# Altium PCB 21A.PcbDoc
Units mil, origin at the board's own origin, x right, y up, seen from the top; angles counter-clockwise.
Board outline 6000 x 4000 mil, 2 copper layers (Top Layer, Bottom Layer); 43 components, 21 nets, 118 pads, 2 vias.
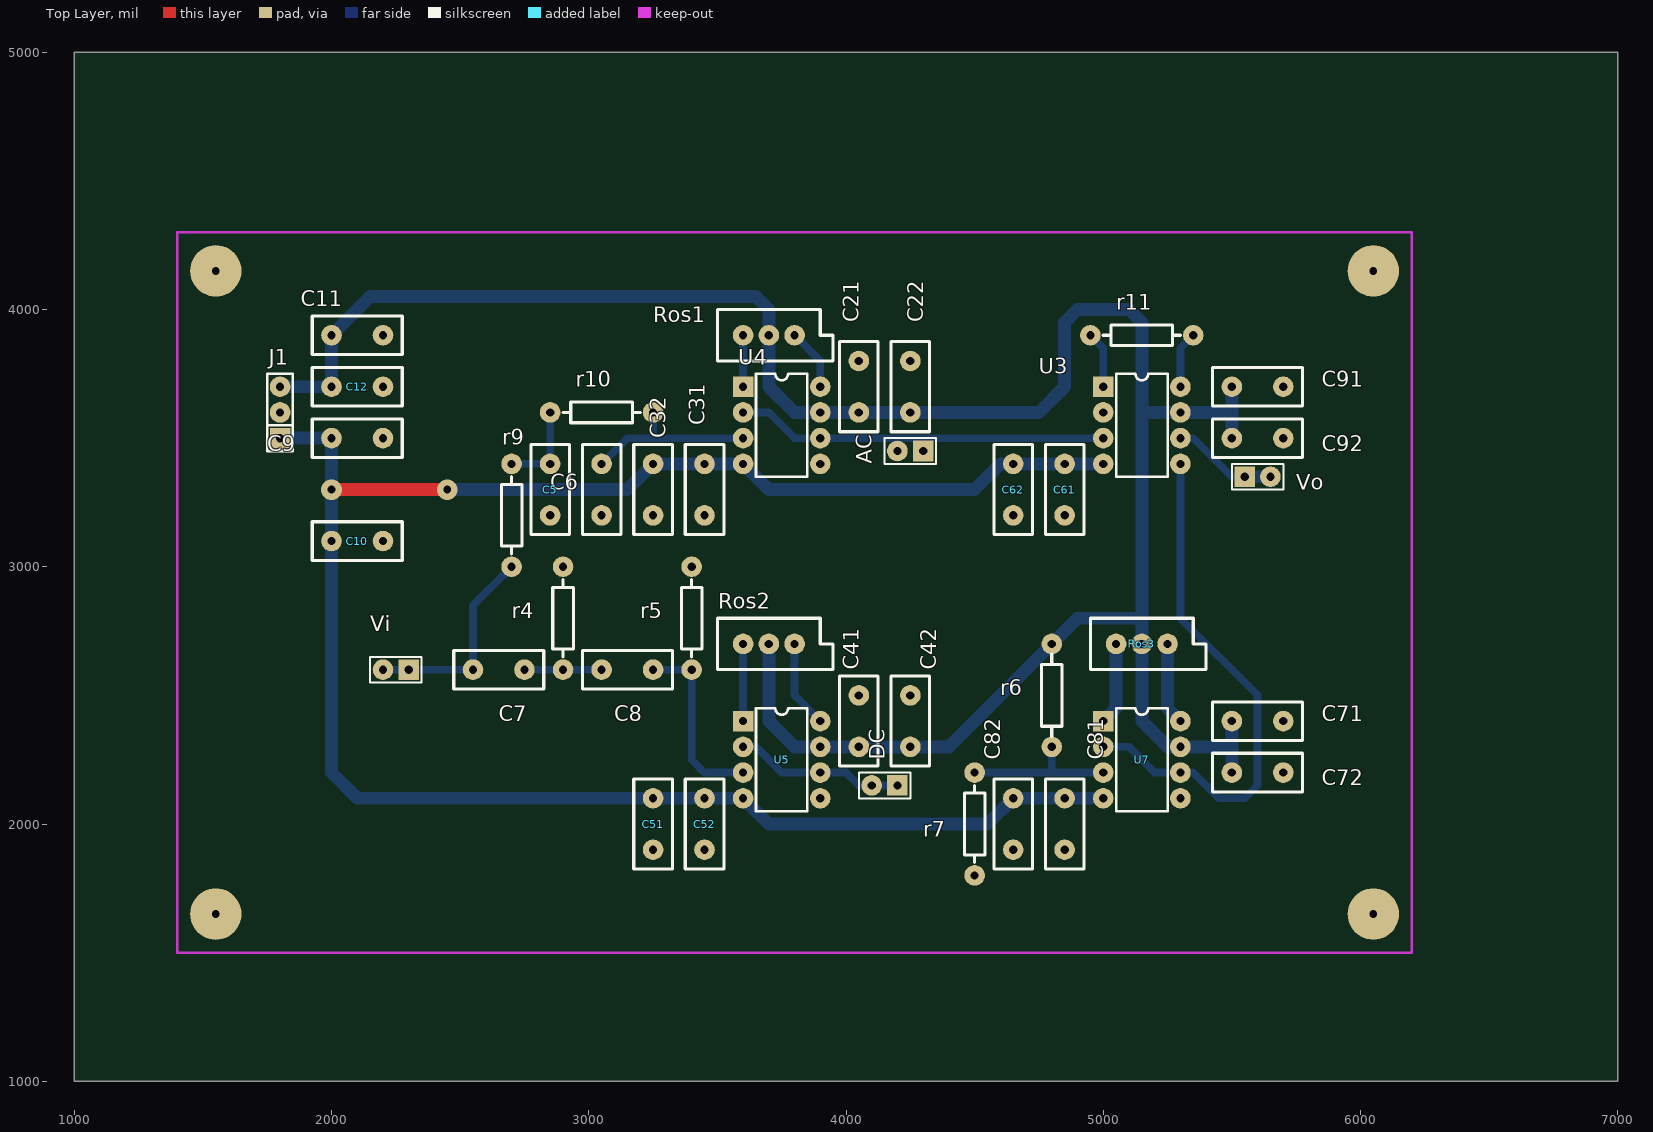
[diagram p0: Top Layer view]
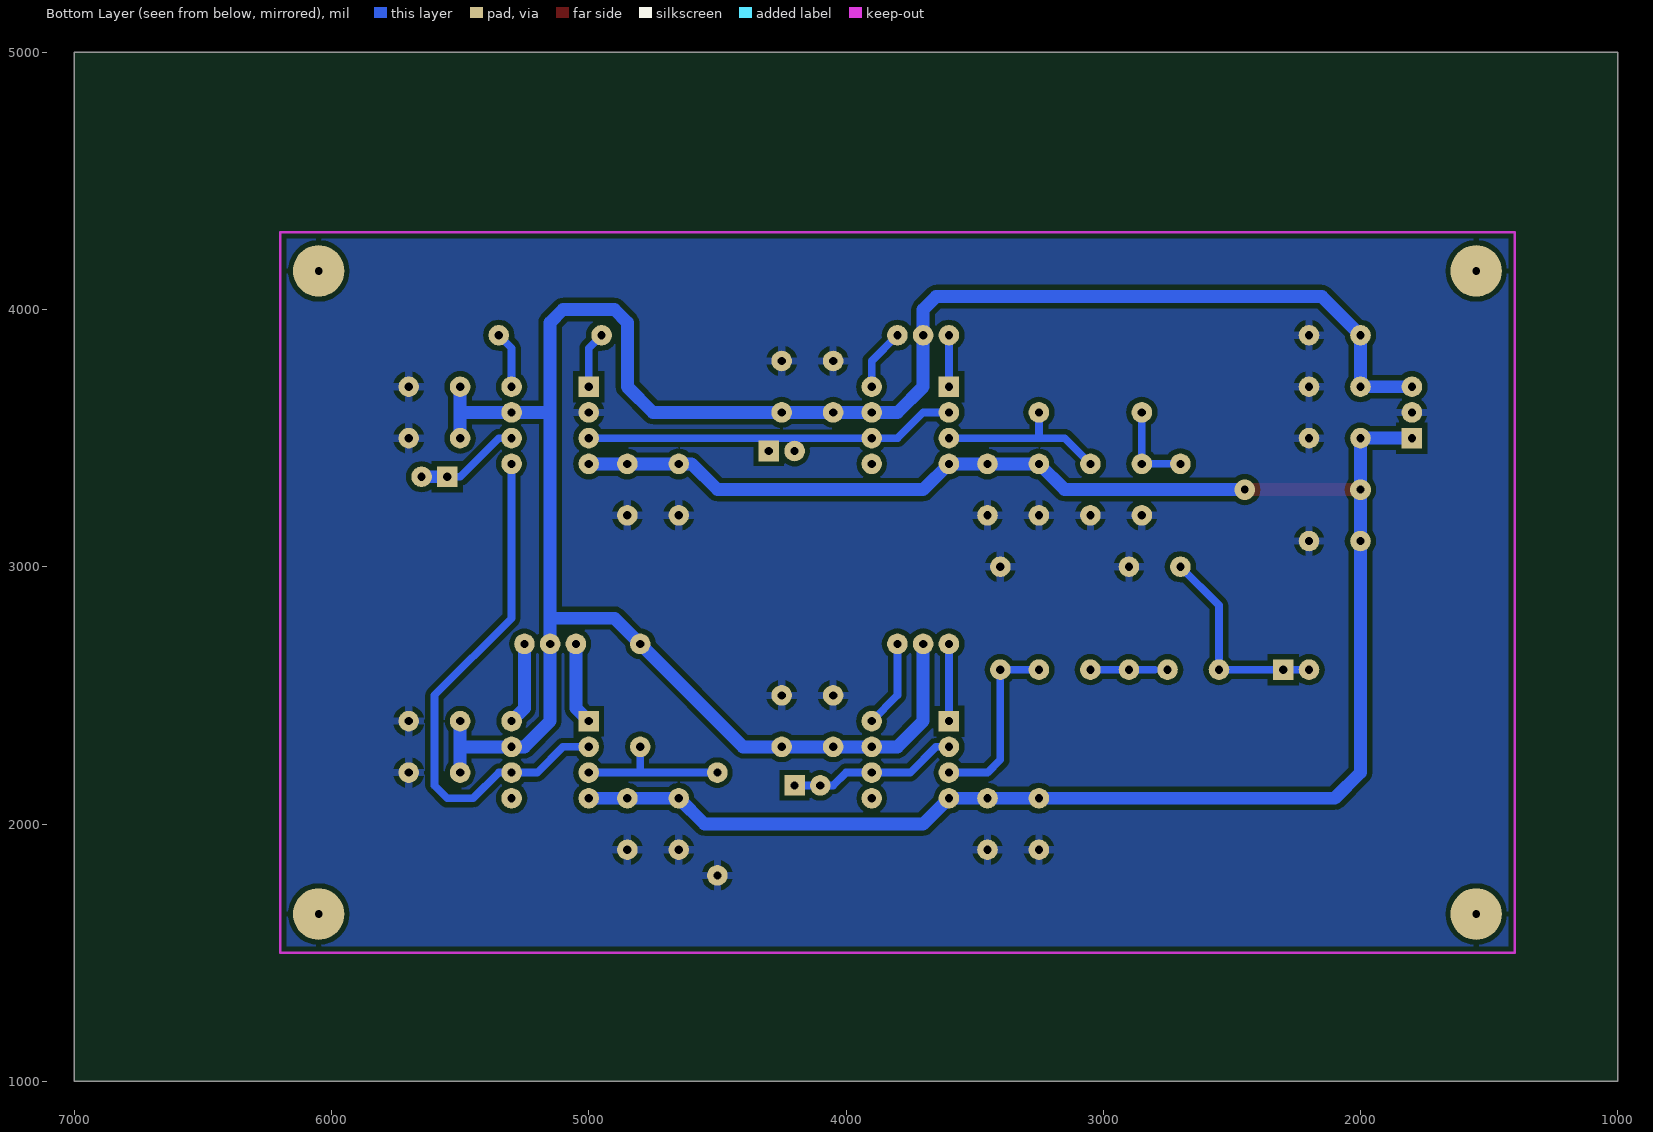
[diagram p1: Bottom Layer view, seen from below]

## Layer stack, top to bottom
Top Layer: signal copper 1.4
Dielectric: dielectric 12.6, FR-4, Dk 4.8
Bottom Layer: signal copper 1.4

## Board outline
1000,1000 7000,1000 7000,5000 1000,5000

## Design rules (kind name [scope] priority, off if disabled: settings)
Clearance [All] p1: gap=20
PolygonConnect Viagndconnect [(InNet('GND') AND InPadClass('All Pads'))] p1: connectstyle=Relief reliefconductorwidth=30 reliefentries=4 polygonreliefangle="90 Angle"
PolygonConnect [All] p2: connectstyle=Relief reliefconductorwidth=30 reliefentries=4 polygonreliefangle="90 Angle"
RoutingVias [All] p1: holewidth=28 width=50 viastyle="Through Hole" minholewidth=28 minwidth=50 maxholewidth=28 maxwidth=50
SilkscreenOverComponentPads [IsPad] p1: minsilkscreentomaskgap=10
SolderMaskExpansion [All] p1: expansion=4
TestPointUsage [All] p1: valid=0 allowmultiple=FALSE
Testpoint [All] p1: side=3 testpointundercomponent=TRUE minsize=40 maxsize=100 preferedsize=60 minholesize=0 maxholesize=40 preferedholesize=32 testpointgrid=1 style=297 order=0123456789
Width [All] p1: maxlimit=100 minlimit=30 preferedwidth=30
23 further rules are at their usual default settings.

## Components (designator, comment, footprint, x,y, rotation, side; value= is the part's Value field where it differs from the comment)
AC "Header 2" HDR1X2 4300,3450 r180 top
C5 "Cap2" RAD0.2 2850,3400 r270 top
C6 "Cap2" RAD0.2 3050,3400 r270 top
C7 "Cap2" RAD0.2 2750,2600 r180 top
C8 "Cap2" RAD0.2 3250,2600 r180 top
C9 "Cap2" RAD0.2 2000,3500 r0 top
C10 "Cap2" RAD0.2 2000,3100 r0 top
C11 "Cap2" RAD0.2 2000,3900 r0 top
C12 "Cap2" RAD0.2 2000,3700 r0 top
C21 "Cap2" RAD0.2 4050,3600 r90 top
C22 "Cap2" RAD0.2 4250,3600 r90 top
C31 "Cap2" RAD0.2 3450,3400 r270 top
C32 "Cap2" RAD0.2 3250,3400 r270 top
C41 "Cap2" RAD0.2 4050,2500 r270 top
C42 "Cap2" RAD0.2 4250,2500 r270 top
C51 "Cap2" RAD0.2 3250,2100 r270 top
C52 "Cap2" RAD0.2 3450,2100 r270 top
C61 "Cap2" RAD0.2 4850,3400 r270 top
C62 "Cap2" RAD0.2 4650,3400 r270 top
C71 "Cap2" RAD0.2 5500,2400 r0 top
C72 "Cap2" RAD0.2 5500,2200 r0 top
C81 "Cap2" RAD0.2 4850,2100 r270 top
C82 "Cap2" RAD0.2 4650,2100 r270 top
C91 "Cap2" RAD0.2 5500,3700 r0 top
C92 "Cap2" RAD0.2 5500,3500 r0 top
DC "Header 2" HDR1X2 4200,2150 r180 top
J1 "power" SIP3 1800,3500 r90 top
r4 "Res1" AXIAL0.4 2900,2600 r90 top
r5 "Res1" AXIAL0.4 3400,2600 r90 top
r6 "Res1" AXIAL-0.4 4800,2300 r90 top
r7 "Res1" AXIAL0.4 4500,1800 r90 top
r9 "Res1" AXIAL0.4 2700,3000 r90 top
r10 "Res1" AXIAL0.4 2850,3600 r0 top
r11 "Res1" AXIAL0.4 5350,3900 r180 top
Ros1 "POT1" VR5 3600,3900 r0 top
Ros2 "POT2" VR5 3600,2700 r0 top
Ros3 "POT1" VR5 5050,2700 r0 top
U3 "AD620ANZ" DIP8 5000,3700 r0 top
U4 "opa2727" DIP8 3600,3700 r0 top
U5 "opa2727" DIP8 3600,2400 r0 top
U7 "opa2727" DIP8 5000,2400 r0 top
Vi "Header 2" HDR1X2 2300,2600 r180 top
Vo "Header 2" HDR1X2 5550,3350 r0 top

## Footprints (in the part's own frame and the unit in brackets; to place one, negate y for a bottom-side part, rotate by r counter-clockwise, add the part's x,y. Pads: shape width x height; smd on the part's side, far side on the other; paste and mask are expansions set on the pad)
AXIAL0.4 [mil]
  round 80 hole 32: 1(0,0) 2(400,0)
  silkscreen extent 50,-40 350,40
AXIAL-0.4 [mil]
  round 80 hole 32: 1(0,0) 2(400,0)
  silkscreen extent 40,-40 360,40
DIP8 [mil]
  rect 80x80 hole 32: 1(0,0)
  round 80 hole 32: 2(0,-100) 3(0,-200) 4(0,-300) 5(300,-300) 6(300,-200) 7(300,-100) 8(300,0)
  silkscreen extent 50,-350 250,50
HDR1X2 [mil] "Connector; Header; 2 Position"
  rect 80x80 hole 32: 1(0,0)
  round 80 hole 32: 2(100,0)
  silkscreen extent -50,-50 150,50
RAD0.2 [mil]
  round 80 hole 32: 1(0,0) 2(200,0)
  silkscreen extent -75,-75 275,75
SIP3 [mil]
  rect 80x80 hole 32: 1(0,0)
  round 80 hole 32: 2(100,0) 3(200,0)
  silkscreen extent -50,-50 250,50
VR5 [mil]
  round 80 hole 32: 1(0,0) 2(200,0) 3(100,0)
  silkscreen extent -100,-100 350,100

## Part data
AC DC Vi Vo: "Header, 2-Pin"
C5 C6 C7 C8 C9 C10 C11 C12 C21 C22 C31 C32 C41 C42 C51 C52 C61 C62 C71 C72 C81 C82 C91 C92: "Capacitor"
J1: library part "HEADER 3"
r4 r5 r6 r7 r9 r10 r11: "Resistor"
Ros1 Ros3: "Potentiometer"
Ros2: library part POT1, "Potentiometer"
U4 U5 U7: library part AD620ANZ

## Free pads (board coordinates)
  round 200 hole 30: 0(1550,4150) 1(1550,1650) 2(6050,1650) 3(6050,4150)

## Via types
v1: diameter 80, hole 30, Top Layer to Bottom Layer, 2 vias

## Nets (pads, with @x,y where several pads share a name; then routed paths per layer and width w, separated by ;. In a path a pad name is that pad's centre, name@x,y a point inside that pad or via, vN(x,y) a via of type N, cw(c..) or ccw(c..) an arc to the next point about the centre after c; other vN are vias at no path point)
+5: C11.1 C12.1 C21.1 C22.1 C41.2 C42.2 C71.1 C72.1 C91.1 C92.1 J1.3 r6.2 Ros1.3 Ros2.3 Ros3.3 U3.7 U4.7 U5.7 U7.7 | length 8997.1
  Bottom Layer w50: J1.3 C12.1 C11.1 2150,4050 3650,4050 3700,4000 Ros1.3 3700,3700 3800,3600 U4.7 C21.1 C22.1 4750,3600 4850,3700 4850,3950 4900,4000 5100,4000 5150,3950 5150,3600 ; Ros2.3 3700,2400 3800,2300 U5.7 C41.2 C42.2 4400,2300 r6.2 4900,2800 5150,2800 ; C72.1 5500,2300 ; C71.1 5500,2300 ; C92.1 5500,3600 ; C91.1 5500,3600 ; 5150,2800 Ros3.3 5150,2400 5250,2300 U7.7 5500,2300 ; 5150,2800 5150,3600 ; 5150,3600 U3.7 5500,3600
-5: C9.1 C10.1 C31.1 C32.1 C51.1 C52.1 C61.1 C62.1 C81.1 C82.1 J1.1 U3.4 U4.4 U5.4 U7.4 | length 7748.5
  Top Layer w50: v1(2000,3300) v1(2450,3300)
  Bottom Layer w50: J1.1 C9.1 v1(2000,3300) C10.1 2000,2200 2100,2100 C51.1 C52.1 U5.4 3700,2000 4550,2000 C82.1 C81.1 U7.4 ; v1(2450,3300) 3150,3300 C32.1 C31.1 U4.4 3700,3300 4500,3300 4600,3400 C62.1 C61.1 U3.4
GND: C5.2 C6.2 C9.2 C10.2 C11.2 C12.2 C21.2 C22.2 C31.2 C32.2 C41.1 C42.1 C51.2 C52.2 C61.2 C62.2 C71.2 C72.2 C81.2 C82.2 C91.2 C92.2 J1.2 r4.2 r5.2 r7.1 U3.2
NetAC_1: AC.1 AC.2 U3.3 U4.2 U4.6 | length 1441.4
  Bottom Layer w30: U4.2 3700,3600 3800,3500 U4.6 U3.3
NetC5_1: C5.1 r9.2 r10.1 | length 350
  Bottom Layer w30: r9.2 C5.1 r10.1
NetC6_1: C6.1 r10.2 U4.3 | length 691.4
  Bottom Layer w30: C6.1 3150,3500 3250,3500 ; r10.2 3250,3500 ; U4.3 3250,3500
NetC7_1: C7.1 C8.2 r4.1 | length 250
  Bottom Layer w30: 2800,2600 r4.1 C8.2
NetC7_2: C7.2 r9.1 Vi.1 Vi.2 | length 812.1
  Bottom Layer w30: Vi.2 Vi.1 C7.2 2550,2850 r9.1
NetC8_1: C8.1 r5.1 U5.3 | length 720.7
  Bottom Layer w30: C8.1 r5.1 3400,2250 3450,2200 U5.3
NetDC_1: DC.1 DC.2 U5.2 U5.6 | length 662.1
  Bottom Layer w30: U5.2 3650,2300 3750,2200 U5.6 4000,2200 4050,2150 DC.2 DC.1
Netr6_1: r6.1 r7.2 U7.3 | length 600
  Bottom Layer w30: r7.2 4800,2200 ; r6.1 4800,2200 ; U7.3 4800,2200
Netr11_1: r11.1 U3.8 | length 220.7
  Bottom Layer w30: U3.8 5300,3850 r11.1
Netr11_2: r11.2 U3.1 | length 220.7
  Bottom Layer w30: r11.2 5000,3850 U3.1
NetRos1_1: Ros1.1 U4.1 | length 200
  Bottom Layer w30: U4.1 Ros1.1
NetRos1_2: Ros1.2 U4.8 | length 241.4
  Bottom Layer w30: Ros1.2 3900,3800 U4.8
NetRos2_1: Ros2.1 U5.1 | length 300
  Bottom Layer w30: U5.1 Ros2.1
NetRos2_2: Ros2.2 U5.8 | length 341.4
  Bottom Layer w30: Ros2.2 3800,2500 U5.8
NetRos3_1: Ros3.1 U7.1 | length 320.7
  Bottom Layer w50: U7.1 5050,2450 Ros3.1
NetRos3_2: Ros3.2 U7.8 | length 320.7
  Bottom Layer w50: Ros3.2 5250,2450 U7.8
NetU3_6: U3.6 Vo.1 Vo.2 | length 412.1
  Bottom Layer w30: U3.6 5350,3500 5500,3350 Vo.1
  Bottom Layer w50: Vo.1 Vo.2
VREF: U3.5 U7.2 U7.6 | length 2077.8
  Bottom Layer w30: U7.2 5100,2300 5200,2200 U7.6 5350,2200 5450,2100 5550,2100 5600,2150 5600,2500 5300,2800 U3.5
pads on no net: U4.5 U5.5 U7.5

## Polygon pours and split planes (outlines as drawn)
GND on Bottom Layer "Bottom Layer-No Net" (solid, pour order 1000): 1400,4300 6200,4300 6200,1500 1400,1500

## Keep-outs
Keep-Out Layer:
  lines w10: 1400,1500 1400,4300 1600,4300 6200,4300 6200,1500 1600,1500 1400,1500